# Altium PCB Fibernet.PcbDoc
Units mm, origin at the board's own origin, x right, y up, seen from the top; angles counter-clockwise.
Board outline 76.2 x 32.77 mm, 2 copper layers (Top Layer, Bottom Layer); 94 components, 63 nets, 349 pads, 25 vias.
Unrouted connection lines stored in the file: 227.
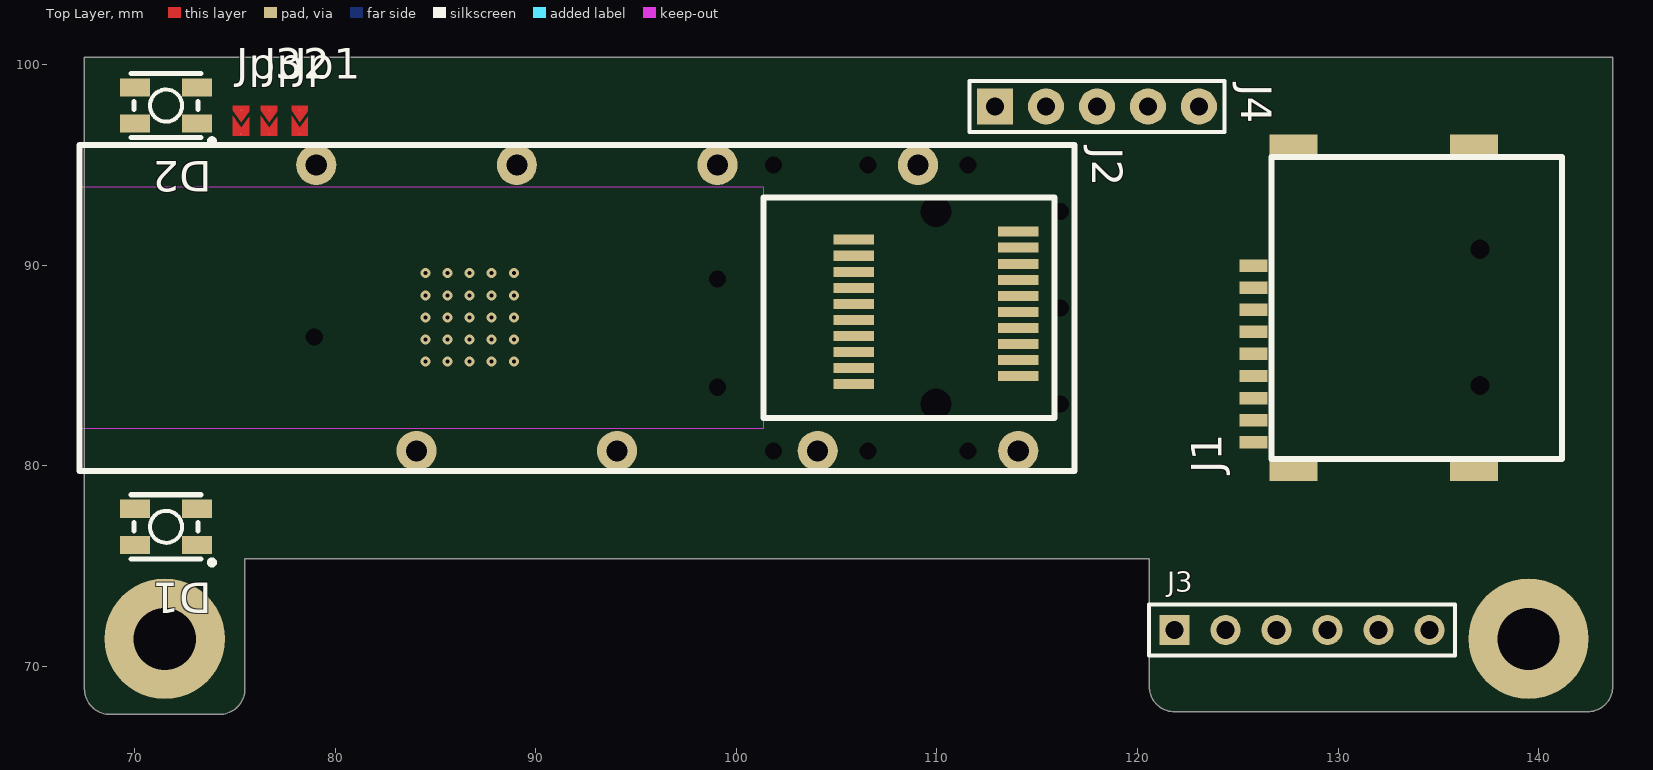
[diagram p0: Top Layer view]
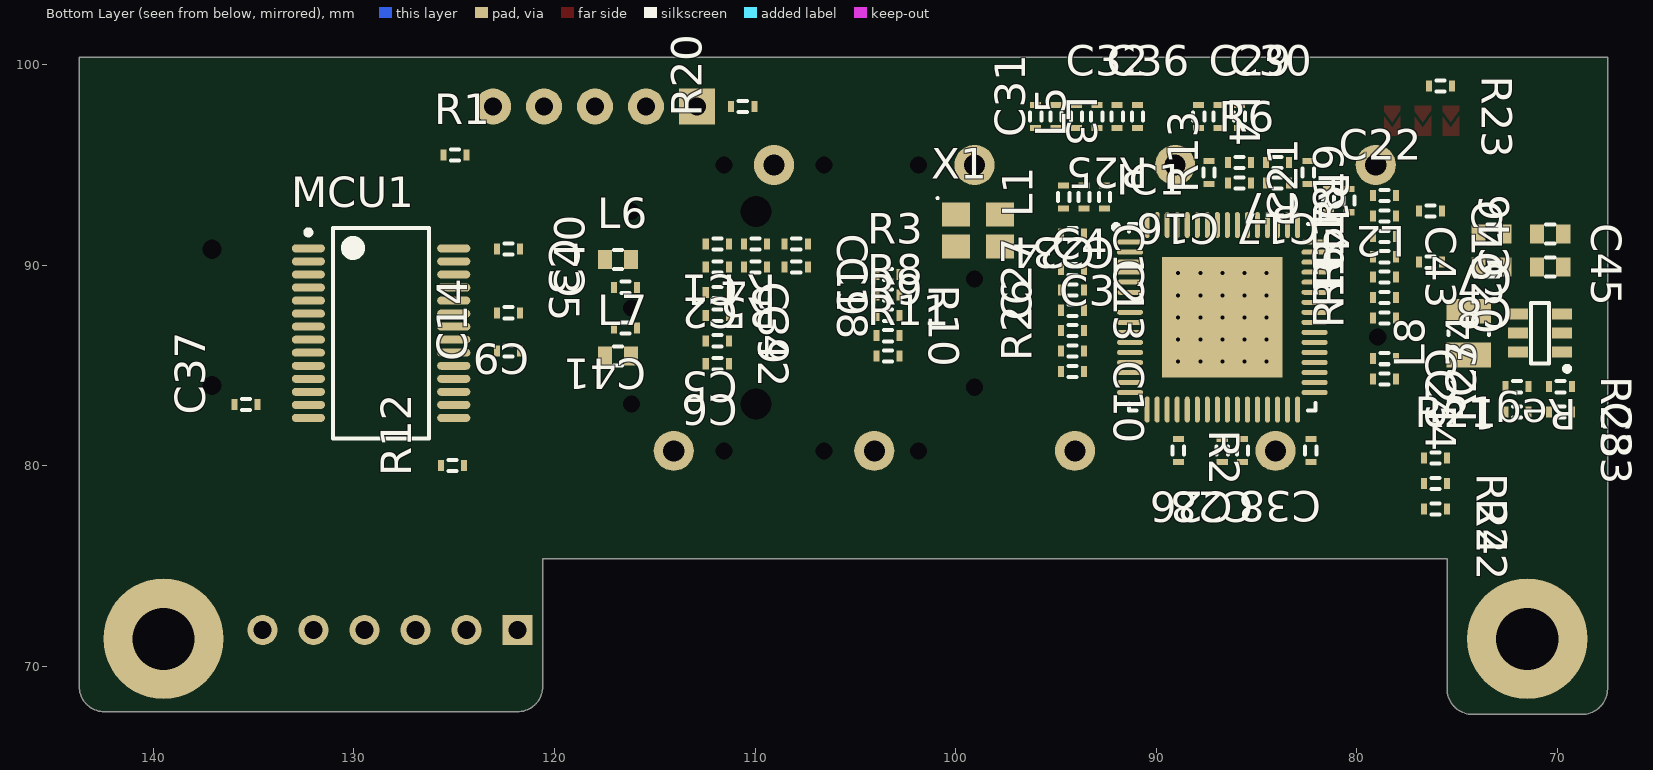
[diagram p1: Bottom Layer view, seen from below]

## Layer stack, top to bottom
Top Solder: solder mask 0.0102, Solder Resist, Dk 3.5
Top Layer: signal copper 0.0356
Dielectric 1: dielectric 0.32, FR-4, Dk 4.8
Bottom Layer: signal copper 0.0356
Bottom Solder: solder mask 0.0102, Solder Resist, Dk 3.5

## Board outline
68.771,67.608 cw(c68.771,68.878) 67.501,68.878 67.501,100.374 143.701,100.374 143.701,69.005 cw(c142.431,69.005) 142.431,67.735 121.857,67.735 cw(c121.857,69.005) 120.587,69.005 120.587,75.374 75.501,75.374 75.501,68.878 cw(c74.231,68.878) 74.231,67.608

## Design rules (kind name [scope] priority, off if disabled: settings)
BoardOutlineClearance [All] p1: gap=0.254 ignorepadtopadclearanceinfootprint=FALSE except(0: Arc-SplitContinuation Track-SplitContinuation SMDPad-SplitContinuation THPad-SplitContinuation Via-SplitContinuation Fill-SplitContinuation Poly-SplitContinuation Region-SplitContinuation Text-SplitContinuation)
Clearance [All] p1: gap=0.254 ignorepadtopadclearanceinfootprint=FALSE except(0: Arc-Text Arc-Hole Track-Text Track-Hole SMDPad-Text SMDPad-Hole THPad-Text THPad-Hole Via-Text Via-Hole Fill-Text Fill-Hole Poly-Text Poly-Hole Region-Text Region-Hole Text-Text Text-Hole; 0.152: Arc-Arc Arc-Track Arc-SMDPad Arc-THPad Arc-Via Track-Track Track-SMDPad Track-THPad Track-Via SMDPad-SMDPad SMDPad-THPad SMDPad-Via THPad-THPad THPad-Via THPad-Fill THPad-Poly THPad-Region Via-Via)
DiffPairsRouting [All] p1: maxlimit=0.254 minlimit=0.152 mostfreqgap=0.203 toplayer_minwidth=0.152 toplayer_maxwidth=10 toplayer_prefwidth=0.22 bottomlayer_minwidth=0.152 bottomlayer_maxwidth=10 bottomlayer_prefwidth=0.22 maxuncoupledlength=12.7
HoleSize [All] p1: absolutevalues=TRUE maxlimit=10 minlimit=0.025 maxpercent=80.000 minpercent=20.000
MinimumSolderMaskSliver [All] p1: minsoldermaskwidth=0
PlaneConnect [All] p1: pad.planeconnectstyle=Relief pad.reliefexpansion=0.508 pad.reliefentries=4 pad.reliefconductorwidth=0.254 pad.reliefairgap=0.254 via.planeconnectstyle=Direct via.reliefexpansion=0.508 via.reliefentries=4 via.reliefconductorwidth=0.254 via.reliefairgap=0.254
PolygonConnect PolygonConnect_1 [InNet('NetC33_1') vs InNet('NetC33_1')] p1: connectstyle=Direct reliefconductorwidth=0.254 reliefentries=4 polygonreliefangle="90 Angle" airgapwidth=0.254
PolygonConnect PolygonConnect_2 [InNet('+VDrive') or InNet('NetC99_2') or InNet('NetC100_2') or InNet('NetC115_2') or InNet('NetC116_2') vs InNet('+VDrive') or InNet('NetC99_2') or InNet('NetC100_2') or InNet('NetC115_2') or InNet('NetC116_2')] p2: connectstyle=Direct reliefconductorwidth=0.254 reliefentries=4 polygonreliefangle="90 Angle" airgapwidth=0.254
PolygonConnect [All] p3: thpad.connectstyle=Relief thpad.reliefconductorwidth=0.254 thpad.reliefentries=4 thpad.polygonreliefangle="90 Angle" thpad.airgapwidth=0.254 smdpad.connectstyle=Relief smdpad.reliefconductorwidth=0.254 smdpad.reliefentries=4 smdpad.polygonreliefangle="90 Angle" smdpad.airgapwidth=0.254 via.connectstyle=Direct via.reliefconductorwidth=0.254 via.reliefentries=4 via.polygonreliefangle="90 Angle" via.airgapwidth=0.254
RoutingVias [All] p1: holewidth=0 width=0 viastyle="Through Hole" minholewidth=0 minwidth=0 maxholewidth=0.711 maxwidth=1.27
SilkToSilkClearance [All] p1: silktosilkclearance=0
SilkToSolderMaskClearance [IsPad] p1: minsilkscreentomaskgap=0 clearancetoexposedcopper=TRUE
SolderMaskExpansion [All] p1: expansion=0.102 istentingtop=FALSE
Width [All] p1: maxlimit=10 minlimit=0.153 preferedwidth=0.3 minimp=50.000000 maximp=50.000000 favimp=50.000000
24 further rules are at their usual default settings.

## Classes and differential pairs
component class "Power Stuff": C15 C16 C17 C18 C19 C20 C21 C22 C23 C24 C25 C26 C27 C28 C29 C30 C31 C32 C33 C34 C35 C36 C37 C38 C39 C40 C41 C42 C43 C44 C45 C46 IC1 L1 L2 L3 L4 L5 L6 L7 L8 R27 R28 Reg1
component class Fibernet: C1 C2 C3 C4 C5 C6 C7 C8 C9 C10 C12 C13 C14 D1 D2 J1 J2 J3 J4 Jp1 Jp2 Jp3 MCU1 R1 R2 R3 R4 R5 R6 R7 R8 R9 R10 R11 R12 R13 R14 R15 R16 R17 R18 R19 R20 R21 R22 R23 R24 R25 R26 X1
differential pair LAN_TX: +LAN_TX_P -LAN_TX_N
differential pair LAN_RX: +LAN_RX_P -LAN_RX_N

## Components (designator, comment, footprint, x,y, rotation, side; value= is the part's Value field where it differs from the comment)
C1 "100nF" 0402 111.887,91.059 r0 bottom
C2 "100nF" 0402 111.887,89.916 r0 bottom
C3 "100nF" 0402 94.174,86.741 r180 bottom
C4 "10uF" 0402 94.174,88.773 r180 bottom
C5 "100nF" 0402 111.887,86.233 r0 bottom
C6 "100nF" 0402 111.887,85.09 r0 bottom
C7 "100nF" 0603 73.279,91.567 r0 bottom
C8 "1uF" 0603 73.279,89.916 r0 bottom
C9 "100nF" 0402 122.301,87.63 r0 bottom
C10 "1uF" 0402 94.174,84.709 r180 bottom
C12 "22pF" 0402 94.174,91.567 r180 bottom
C13 "22pF" 0402 94.174,89.789 r180 bottom
C14 "10uF" 0402 122.301,85.725 r0 bottom
C15 "100nF" 0402 76.327,92.71 r180 bottom
C16 "100nF" 0402 87.376,94.615 r270 bottom
C17 "100nF" 0402 82.423,94.615 r270 bottom
C18 "100nF" 0402 107.95,89.916 r180 bottom
C19 "100nF" 0402 107.95,91.059 r180 bottom
C20 "1uF" 0402 76.327,90.154 r180 bottom
C21 "1uF" 0402 81.407,93.218 r90 bottom
C22 "100nF" 0402 80.391,93.218 r90 bottom
C23 "1uF" 0402 92.583,93.412 r270 bottom
C24 "100nF" 0402 93.599,93.412 r270 bottom
C25 "100nF" 0402 78.613,85.344 r180 bottom
C26 "100nF" 0402 86.71,80.754 r270 bottom
C27 "470pF" 0402 94.174,87.757 r0 bottom
C28 "1uF" 0402 85.694,80.754 r270 bottom
C29 "1uF" 0402 86.868,97.409 r90 bottom
C30 "100nF" 0402 85.852,97.409 r90 bottom
C31 "1uF" 0402 94.996,97.409 r90 bottom
C32 "100nF" 0402 93.98,97.409 r90 bottom
C33 "100pF" 0402 69.85,82.677 r180 bottom
C34 "100nF" 0402 72.009,83.947 r0 bottom
C35 "10uF" 0402 122.301,90.805 r180 bottom
C36 "100nF" 0402 91.948,97.409 r90 bottom
C37 "10uF" 0402 135.382,83.058 r0 bottom
C38 "100nF" 0402 82.296,80.772 r270 bottom
C39 "10uF" 0402 111.887,88.646 r180 bottom
C40 "100nF" 0402 116.459,88.9 r0 bottom
C41 "10uF" 0402 116.459,86.868 r0 bottom
C42 "100nF" 0402 111.887,87.503 r180 bottom
C43 "10uF" 0402 78.613,91.44 r180 bottom
C44 "10uF" 0402 78.613,84.328 r180 bottom
C45 "100nF" 0603 70.358,91.567 r180 bottom
C46 "100nF" 0603 70.358,89.916 r0 bottom
D1 "RGB LED Common anode" 1411 71.568,76.959 r180 top
D2 "RGB LED Common anode" 1411 71.568,97.961 r180 top
IC1 "LAN9250" QFN64 86.705,87.404 r180 bottom
J1 "SD Card" MEM2075 127.779,79.799 r90 top
J2 "SFP" "SFP Con and Cage" 109.058,87.874 r0 top locked
J3 "UART/Power" HDR1X6 121.857,71.818 r0 top
J4 "ICSP" HDR1X5 112.903,97.917 r0 top
Jp1 "AKTY Red" "PCB Jumper NO" 78.232,97.155 r90 top
Jp2 "AKTY Blue" "PCB Jumper NO" 76.708,97.155 r90 top
Jp3 "AKTY Green" "PCB Jumper NO" 75.311,97.155 r90 top
L1 "Ferrite Bead" 0402 94.615,93.412 r90 bottom
L2 "Ferrite Bead" 0402 78.613,93.472 r0 bottom
L3 "Ferrite Bead" 0402 96.012,97.409 r270 bottom
L4 "Ferrite Bead" 0402 87.884,97.409 r270 bottom
L5 "Ferrite Bead" 0402 92.964,97.409 r90 bottom
L6 "1uH" 0603 116.84,90.297 r180 bottom
L7 "1uH" 0603 116.84,85.471 r180 bottom
L8 "6.8uH" 1008 74.422,86.614 r90 bottom
MCU1 "PIC32MX270F256B" TSSOP28_Wide 128.651,86.614 r180 bottom
R1 "10k" 0402 124.968,95.504 r180 bottom
R2 "10k" 0402 88.9,80.772 r270 bottom
R3 "4.7k" 0402 103.378,89.535 r180 bottom
R4 "49.9" 0402 109.982,91.059 r0 bottom
R5 "49.9" 0402 109.982,89.916 r0 bottom
R6 "82" 0402 85.852,95.123 r180 bottom
R7 "82" 0402 83.947,95.123 r0 bottom
R8 "4.7k" 0402 103.378,87.503 r180 bottom
R9 "4.7k" 0402 103.378,86.487 r180 bottom
R10 "4.7k" 0402 103.378,88.519 r180 bottom
R11 "4.7k" 0402 103.378,85.471 r180 bottom
R12 "1k" 0402 125.095,80.01 r0 bottom
R13 "130" 0402 85.852,94.107 r0 bottom
R14 "130" 0402 83.947,94.107 r180 bottom
R15 "10k" 0402 78.613,88.392 r0 bottom
R16 "10k" 0402 78.613,87.376 r0 bottom
R17 "10k" 0402 78.613,89.408 r0 bottom
R18 "10k" 0402 78.613,90.424 r0 bottom
R19 "10k" 0402 78.613,92.456 r0 bottom
R20 "10k" 0402 110.617,97.917 r0 bottom
R21 "1k" 0402 76.073,80.391 r180 bottom
R22 "1k" 0402 76.073,77.851 r180 bottom
R23 "1k" 0402 75.819,98.933 r180 bottom
R24 "1k" 0402 76.073,79.121 r180 bottom
R25 "12.1k 1%" 0402 90.932,97.409 r270 bottom
R26 "1k" 0402 94.174,85.725 r0 bottom
R27 "10k" 0402 72.009,82.677 r0 bottom
R28 "10k" 0402 69.85,83.947 r180 bottom
Reg1 "Buck regulator" TSOT26 70.866,86.614 r0 bottom
X1 "25MHz" "ECS-3225MV Oscillator" 98.89,91.732 r180 bottom

## Footprints (in the part's own frame and the unit in brackets; to place one, negate y for a bottom-side part, rotate by r counter-clockwise, add the part's x,y. Pads: shape width x height; smd on the part's side, far side on the other; paste and mask are expansions set on the pad)
0402 [mm] "Chip Resistor, 2-Leads, Body 1.55x0.85mm, IPC Medium Density"
  rect 0.3x0.55 smd: 1(-0.575,0) 2(0.575,0)
  silkscreen extent -0.2,-0.28 0.2,0.28, body extent -0.53,-0.28 0.53,0.28, height 0.4
0603 [mm] "Chip Resistor, 2-Leads, Body 1.55x0.85mm, IPC Medium Density"
  rect 0.7x0.95 smd: 1(-0.65,0) 2(0.65,0)
  silkscreen extent -0.2,-0.48 0.2,0.48, body extent -0.8,-0.48 0.8,0.48, height 0.55
1008 [mm] "Chip Inductor, 2-Leads, Body 2,50x2,00mm, IPC Medium Density"
  rect 1.23x2.22 smd: 1(-1.085,0) 2(1.085,0)
  silkscreen extent -0.1,-1.01 0.1,1.01, body extent -1.35,-1.1 1.35,1.1, height 1.2
1411 [mm] "4 PIN SMD RGB LED"
  rect 1.5x0.9 smd: 1(1.55,0.9) 2(1.55,-0.9) 3(-1.55,0.9) 4(-1.55,-0.9)
  silkscreen extent -2.41,-1.6 1.75,1.9, body extent -1.75,-1.4 1.75,1.4, height 1.88
"ECS-3225MV Oscillator" [mm] "SON, 4-Leads, Body 2,50x3,20mm, Pitch 1,60mm, Thermal Pad 0,00x0,00mm, IPC Low Density"
  rect 1.4x1.2 smd: 1(-1.1,0.8) 2(-1.1,-0.8) 3(1.1,-0.8) 4(1.1,0.8)
  silkscreen extent -2.06,1.56 -1.96,1.66, body extent -1.65,-1.3 1.65,1.3, height 1.2
HDR1X5 [mm] "Connector; Header; 5 Position"
  rect 1.8x1.8 hole 0.9: 1(0,0)
  round 1.8 hole 0.9: 2(2.54,0) 3(5.08,0) 4(7.62,0) 5(10.16,0)
  silkscreen extent -1.27,-1.27 11.43,1.27
HDR1X6 [mm] "Connector; Header; 6 Position"
  rect 1.5x1.5 hole 0.9: 1(0,0)
  round 1.5 hole 0.9: 2(2.54,0) 3(5.08,0) 4(7.62,0) 5(10.16,0) 6(12.7,0)
  silkscreen extent -1.27,-1.27 13.97,1.27
MEM2075 [mm] "Micro SD Card Holder"
  rect 0.62x1.4 smd: 1(10.18,2) 2(9.08,2) 3(7.98,2) 4(6.88,2) 5(5.78,2) 6(4.68,2) 7(3.58,2) 8(2.48,2) 9(1.38,2)
  rect 1.12x2.4 smd: 6(0,0) 6(0,-9) 6(16.15,-9) 6(16.15,0)
  round 0 hole 0.95: ""(4.2,-9.296) ""(11,-9.296)
  silkscreen extent 0.55,-13.4 15.6,1.1, body extent -0.18,-13.64 16.26,2.21, height 1.4
"PCB Jumper NO" [mil] "Normally open pcb jumper"
  round 1 smd mask+0: 1(23,0) 2(-24,0)
  Top Layer region: -27.75,-16 -27.75,16 12,16 -12,0 10,-16
  Top Layer region: 21,-16 -1,0 23,16 31,16 31,-16
QFN64 [mm] "QFN, 64-Leads, Body 9,00x9,00mm, Pitch 0,50mm, Thermal Pad 6,00x6,00mm, IPC Medium Density"
  oval 1.3x0.25 smd: 1(-4.6,3.75) 2(-4.6,3.25) 3(-4.6,2.75) 4(-4.6,2.25) 5(-4.6,1.75) 6(-4.6,1.25) 7(-4.6,0.75) 8(-4.6,0.25) 9(-4.6,-0.25) 10(-4.6,-0.75) 11(-4.6,-1.25) 12(-4.6,-1.75) 13(-4.6,-2.25) 14(-4.6,-2.75) 15(-4.6,-3.25) 16(-4.6,-3.75) 33(4.6,-3.75) 34(4.6,-3.25) 35(4.6,-2.75) 36(4.6,-2.25) 37(4.6,-1.75) 38(4.6,-1.25) 39(4.6,-0.75) 40(4.6,-0.25) 41(4.6,0.25) 42(4.6,0.75) 43(4.6,1.25) 44(4.6,1.75) 45(4.6,2.25) 46(4.6,2.75) 47(4.6,3.25) 48(4.6,3.75)
  oval 0.25x1.3 smd: 17(-3.75,-4.6) 18(-3.25,-4.6) 19(-2.75,-4.6) 20(-2.25,-4.6) 21(-1.75,-4.6) 22(-1.25,-4.6) 23(-0.75,-4.6) 24(-0.25,-4.6) 25(0.25,-4.6) 26(0.75,-4.6) 27(1.25,-4.6) 28(1.75,-4.6) 29(2.25,-4.6) 30(2.75,-4.6) 31(3.25,-4.6) 32(3.75,-4.6) 49(3.75,4.6) 50(3.25,4.6) 51(2.75,4.6) 52(2.25,4.6) 53(1.75,4.6) 54(1.25,4.6) 55(0.75,4.6) 56(0.25,4.6) 57(-0.25,4.6) 58(-0.75,4.6) 59(-1.25,4.6) 60(-1.75,4.6) 61(-2.25,4.6) 62(-2.75,4.6) 63(-3.25,4.6) 64(-3.75,4.6)
  rect 6x6 smd: 65(0,0)
  silkscreen extent -5.43,-4.65 4.65,4.65, body extent -4.5,-4.5 4.5,4.5, height 1
"SFP Con and Cage" [mm]
  rect 2x0.5 smd: 1(-3.2,3.4) 2(-3.2,2.6) 3(-3.2,1.8) 4(-3.2,1) 5(-3.2,0.2) 6(-3.2,-0.6) 7(-3.2,-1.4) 8(-3.2,-2.2) 9(-3.2,-3) 10(-3.2,-3.8) 11(5,-3.4) 12(5,-2.6) 13(5,-1.8) 14(5,-1) 15(5,-0.2) 16(5,0.6) 17(5,1.4) 18(5,2.2) 19(5,3) 20(5,3.8)
  round 2 hole 1.05: S(-30,7.125) S(-25,-7.125) S(-20,7.125) S(-15,-7.125) S(-10,7.125) S(-5,-7.125) S(0,7.125) S(5,-7.125)
  round 0 hole 0.85: ""(-30.1,-1.455) ""(-10,-3.955) ""(-10,1.445) ""(-7.2,-7.125) ""(-7.2,7.125) ""(-2.5,-7.125) ""(-2.5,7.125) ""(2.5,-7.125) ""(2.5,7.125) ""(7.1,-4.8) ""(7.1,0) ""(7.1,4.8)
  round 0 hole 1.55: ""(0.9,-4.8) ""(0.9,4.8)
  Top Layer keep-out region: -7.712,5.51 -7.712,-5.49 -7.712,-6.035 -41.82,-6.035 -41.82,6.03 -7.712,6.03
  silkscreen extent -41.81,-8.13 7.8,8.13, body extent -41.51,-8 7.47,7.85, height 10.84
TSOT26 [mm] "SOT23, 6-Leads, Body 2.90x2.80mm, Pitch 0.95mm, IPC Medium Density"
  rect 1x0.55 smd: 1(-1.099,0.95) 2(-1.099,0) 3(-1.099,-0.95) 4(1.099,-0.95) 5(1.099,0) 6(1.099,0.95)
  silkscreen extent -1.47,-1.5 0.45,1.9, body extent -1.4,-1.5 1.4,1.5, height 1
TSSOP28_Wide [mm] "TSSOP, 28-Leads, Body 10.20x5.30mm, Pitch 0.65mm, Microchip"
  oval 1.65x0.4 smd paste-0.1: 1(-3.625,4.225) 2(-3.625,3.575) 3(-3.625,2.925) 4(-3.625,2.275) 5(-3.625,1.625) 6(-3.625,0.975) 7(-3.625,0.325) 8(-3.625,-0.325) 9(-3.625,-0.975) 10(-3.625,-1.625) 11(-3.625,-2.275) 12(-3.625,-2.925) 13(-3.625,-3.575) 14(-3.625,-4.225) 15(3.625,-4.225) 16(3.625,-3.575) 17(3.625,-2.925) 18(3.625,-2.275) 19(3.625,-1.625) 20(3.625,-0.975) 21(3.625,-0.325) 22(3.625,0.325) 23(3.625,0.975) 24(3.625,1.625) 25(3.625,2.275) 26(3.625,2.925) 27(3.625,3.575) 28(3.625,4.225)
  silkscreen extent -3.75,-5.25 2.4,5.25, body extent -3.9,-5.25 3.9,5.25, height 2

## Part data
C1 C2 C3 C4 C5 C6 C7 C8 C9 C10 C12 C13 C14 C15 C16 C17 C18 C19 C20 C21 C22 C23 C24 C25 C26 C27 C28 C29 C30 C31 C32 C33 C34 C35 C36 C37 C38 C39 C40 C41 C42 C43 C44 C45 C46: library part Cap, Supplier Part Number 1=1276-2044-1-ND, Supplier Part Number 10=1276-CL10B104KB8NNNLCT-ND, Supplier Part Number 11=399-1085-1-ND, Supplier Part Number 12=1276-1021-1-ND, Supplier Part Number 13=587-2985-1-ND, Supplier Part Number 14=490-14603-1-ND, Supplier Part Number 15=311-3700-1-ND, Supplier Part Number 16=311-1042-1-ND, Supplier Part Number 17=311-1415-1-ND, Supplier Part Number 18=1276-1907-1-ND, Supplier Part Number 19=587-4321-1-ND, Supplier 1=Digi-Key, Supplier 2=Digi-Key, Supplier 3=Digi-Key, Supplier 4=Digi-Key, Supplier 5=Digi-Key, Supplier 6=Digi-Key, Supplier 7=Digi-Key, Supplier 8=Digi-Key, Supplier 9=Digi-Key, Supplier 10=Digi-Key, Supplier 11=Digi-Key, Supplier 12=Digi-Key, Supplier 13=Digi-Key, Supplier 14=Digi-Key, Supplier 15=Digi-Key, Supplier 16=Digi-Key, Supplier 17=Digi-Key, Supplier 18=Digi-Key, Supplier 19=Digi-Key, Supplier Part Number 2=1276-1018-1-ND, Supplier Part Number 3=1276-1182-1-ND, Supplier Part Number 4=1276-1009-1-ND, Supplier Part Number 5=1276-1098-1-ND, Supplier Part Number 6=1276-1119-1-ND, Supplier Part Number 7=490-12737-1-ND, Supplier Part Number 8=1276-1183-1-ND, Supplier Part Number 9=587-1249-1-ND
  C1 C2 C5 C6 C7 C8 C9 C10 C12 C13 C14 C15 C16 C17 C18 C19 C20 C21 C22 C23 C24 C25 C26 C27 C28 C29 C30 C31 C32 C33 C34 C35 C36 C37 C38 C39 C40 C41 C42 C43 C44 C45 C46: Supplier 20=Digi-Key, Supplier 21=Digi-Key, Supplier 22=Digi-Key, Supplier Part Number 20=1276-6767-1-ND, Supplier Part Number 21=1276-7060-1-ND, Supplier Part Number 22=311-1084-1-ND
D1 D2: library part "RGB LED", "RGB LED Invered"
IC1: "10/100 Ethernet controller & PHY", Supplier Part Number 1=LAN9250/ML-ND, ComponentLink1Description=Datasheet, ComponentLink1URL=https://ww1.microchip.com/downloads/en/DeviceDoc/00001913A.pdf, Supplier 1=Digi-Key
J1: Supplier Part Number 1=609-3956-1-ND, Supplier 1=Digi-Key, Supplier 2=Digi-Key, Supplier Part Number 2=2073-MEM2075-00-140-01-ACT-ND
J2: library part "SFP Connector", "SFP Connector with cage", Supplier Part Number 1=UE75-A20-6000TCT-ND, Supplier 1=Digi-Key, Supplier 2=Digi-Key, Supplier Part Number 2=U77-A1118-200TCT-ND
J3: library part "Header 6", "Header, 6-Pin", LatestRevisionDate=17-Jul-2002, LatestRevisionNote="Re-released for DXP Platform.", Publisher="Altium Limited"
J4: library part "Header 5", "Header, 5-Pin", LatestRevisionDate=17-Jul-2002, LatestRevisionNote="Re-released for DXP Platform.", Publisher="Altium Limited"
Jp1 Jp2 Jp3: library part Jumper
L1 L2 L3 L4 L5 L6 L7: library part Inductor, Supplier Part Number 1=541-1250-1-ND, Supplier Part Number 10=SRP1770TA-5R6MCT-ND, Supplier Part Number 11=SRN6028-100MCT-ND, Supplier Part Number 12=SRN2510F-2R2MCT-ND, Supplier Part Number 13=490-3992-1-ND, Supplier 1=Digi-Key, Supplier 2=Digi-Key, Supplier 3=Digi-Key, Supplier 4=Digi-Key, Supplier 5=Digi-Key, Supplier 6=Digi-Key, Supplier 7=Digi-Key, Supplier 8=Digi-Key, Supplier 9=Digi-Key, Supplier 10=Digi-Key, Supplier 11=Digi-Key, Supplier 12=Digi-Key, Supplier 13=Digi-Key, Supplier Part Number 2=541-1253-1-ND, Supplier Part Number 3=SRN6028-3R9MCT-ND, Supplier Part Number 4=SRN6028-4R7MCT-ND, Supplier Part Number 5=490-10563-1-ND, Supplier Part Number 6=1276-6932-1-ND, Supplier Part Number 7=587-2042-1-ND, Supplier Part Number 8=535-12790-1-ND, Supplier Part Number 9=SRP1265A-1R0MCT-ND
L8: library part Inductor, Supplier Part Number 1=541-1250-1-ND, Supplier Part Number 10=SRP1770TA-5R6MCT-ND, Supplier Part Number 11=SRN6028-100MCT-ND, Supplier 1=Digi-Key, Supplier 2=Digi-Key, Supplier 3=Digi-Key, Supplier 4=Digi-Key, Supplier 5=Digi-Key, Supplier 6=Digi-Key, Supplier 7=Digi-Key, Supplier 8=Digi-Key, Supplier 9=Digi-Key, Supplier 10=Digi-Key, Supplier 11=Digi-Key, Supplier Part Number 2=541-1253-1-ND, Supplier Part Number 3=SRN6028-3R9MCT-ND, Supplier Part Number 4=SRN6028-4R7MCT-ND, Supplier Part Number 5=490-10563-1-ND, Supplier Part Number 6=1276-6932-1-ND, Supplier Part Number 7=587-2042-1-ND, Supplier Part Number 8=535-12790-1-ND, Supplier Part Number 9=SRP1265A-1R0MCT-ND
MCU1: library part PIC32MX2xxFxxxB, "32Bit pic with usb", Supplier Part Number 1=PIC32MX270F256B-I/SS-ND, Supplier 1=Digi-Key
R1 R2 R3 R4 R5 R6 R7 R8 R9 R10 R11 R12 R13 R14 R15 R16 R17 R18 R19 R20 R21 R22 R23 R24 R25 R26 R27 R28: library part Resistor
Reg1: library part AP6320, Supplier Part Number 1=AP63203WU-7DICT-ND, Supplier 1=Digi-Key, Supplier 2=Digi-Key, Supplier 3=Digi-Key, Supplier Part Number 2=AP63200WU-7DICT-ND, Supplier Part Number 3=AP63201WU-7DICT-ND
X1: library part "Quarz crystal", Supplier Part Number 1=SER4069TR-ND, Supplier 1=Digi-Key

## Free pads (board coordinates)
  round 6 hole 3.1: ""(71.501,71.374) ""(139.501,71.374)

## Via types
v1: diameter 0.5, hole 0.2, Top Layer to Bottom Layer, 25 vias

## Nets (pads, with @x,y where several pads share a name; then routed paths per layer and width w, separated by ;. In a path a pad name is that pad's centre, name@x,y a point inside that pad or via, vN(x,y) a via of type N, cw(c..) or ccw(c..) an arc to the next point about the centre after c; other vN are vias at no path point)
"+1.2V Core": C25.1 C26.1 C27.1 C28.1 IC1.6 IC1.24 IC1.38 L3.1 L4.1
"+1.2V PHY 1": C29.1 C30.1 IC1.56 L4.2
"+1.2V PHY 2": C31.1 C32.1 IC1.59 L3.2
+3.3V: C3.2 C4.2 C7.2 C8.2 C9.2 C10.2 C15.1 C16.1 C17.1 C18.1 C19.1 C20.1 C33.1 C35.1 C37.1 C38.1 C43.1 C44.1 IC1.5 IC1.7 IC1.8 IC1.14 IC1.20 IC1.32 IC1.37 IC1.47 J1.4 J4.2 L1.1 L2.1 L5.2 L6.1 L7.1 L8.2 MCU1.13 MCU1.23 MCU1.28 R1.1 R2.1 R3.2 R4.1 R5.1 R6.1 R7.1 R8.2 R9.2 R10.2 R11.2 R15.1 R16.1 R20.1 R27.2
"+3.3V PHY 1": C21.1 C22.1 IC1.51 L2.2
"+3.3V PHY 2": C23.1 C24.1 IC1.64 L1.2
"+3.3V SFP RX": C41.1 C42.1 J2.15 L6.2
"+3.3V SFP TX": C39.1 C40.1 J2.16 L7.2
+5V: C45.2 C46.1 D1.1 J3.6 Reg1.2 Reg1.3
GND: C3.1 C4.1 C7.1 C8.1 C9.1 C10.1 C12.1 C13.1 C14.1 C15.2 C16.2 C17.2 C18.2 C19.2 C20.2 C21.2 C22.2 C23.2 C24.2 C25.2 C26.2 C27.2 C28.2 C29.2 C30.2 C31.2 C32.2 C35.2 C36.2 C37.2 C38.2 C39.2 C40.2 C41.2 C42.2 C43.2 C44.2 C45.1 C46.2 IC1.4 IC1.34 IC1.41 IC1.65 J1. J1.6 J2.1 J2.3 J2.9 J2.10 J2.11 J2.14 J2.17 J2.20 J2.S J3.1 J4.3 Jp1.2 Jp2.2 Jp3.2 MCU1.8 MCU1.19 MCU1.27 R13.2 R14.2 R17.1 R18.1 R19.1 R25.1 R26.2 R28.1 Reg1.4
  other v1: 84.505,85.204 85.605,85.204 86.705,85.204 87.805,85.204 88.905,85.204 84.505,86.304 85.605,86.304 86.705,86.304 87.805,86.304 88.905,86.304 84.505,87.404 85.605,87.404 86.705,87.404 87.805,87.404 88.905,87.404 84.505,88.504 85.605,88.504 86.705,88.504 87.805,88.504 88.905,88.504 84.505,89.604 85.605,89.604 86.705,89.604 87.805,89.604 88.905,89.604
"LAN CS": IC1.50 MCU1.18
"LAN LOS": IC1.9 J2.8
"LAN MISO": IC1.13 MCU1.24
"LAN MOSI": IC1.17 MCU1.17
"LAN RST": IC1.11 MCU1.16 R26.1
"LAN SCK": IC1.19 MCU1.26
LAN_RX_N: C6.1 IC1.54 R7.2 R14.1
LAN_RX_P: C5.1 IC1.55 R6.2 R13.1
LAN_TX_N: C1.1 IC1.52 R4.2
LAN_TX_P: C2.1 IC1.53 R5.2
LED2: D2.1 R23.1
"LED B": D1.3 R22.2
"LED G": D1.2 R21.2
"LED R": D1.4 R24.2
MCLR: J4.1 MCU1.1 R20.2
NetC1_2: C1.2 J2.19
NetC2_2: C2.2 J2.18
NetC5_2: C5.2 J2.13
NetC6_2: C6.2 J2.12
NetC12_2: C12.2 IC1.1 X1.4
NetC13_2: C13.2 IC1.2 X1.2
NetC14_2: C14.2 MCU1.20
NetC33_2: C33.2 R27.1 R28.2 Reg1.1
NetC34_1: C34.1 Reg1.6
NetC34_2: C34.2 L8.1 Reg1.5
NetC36_1: C36.1 IC1.58 L5.1
NetD2_1: D2.4 Jp1.1
NetD2_3: D2.3 Jp2.1
NetD2_4: D2.2 Jp3.1
NetIC1_42: IC1.42 R16.2
NetIC1_43: IC1.43 R15.2
NetIC1_45: IC1.45 R17.2 R23.2
NetIC1_46: IC1.46 R18.2
NetIC1_48: IC1.48 R19.2
NetIC1_57: IC1.57 R25.2
NetJ1_11: J1.9 R2.2 R12.2
NetJ2_2: J2.2 R3.1
NetJ2_4: J2.4 R10.1
NetJ2_5: J2.5 R8.1
NetJ2_6: J2.6 R9.1
NetJ2_7: J2.7 R11.1
NetMCU1_6: MCU1.6 R21.1
PGC: J4.5 MCU1.5
PGD: J4.4 MCU1.4
"SD CD / LAN IRQ": IC1.44 MCU1.2 R12.1
"SD CLK": J1.5 MCU1.25
"SD CS": J1.2 MCU1.11
"SD MISO": J1.7 MCU1.3 R1.2
"SD MOSI": J1.3 MCU1.12
"UART RX": J3.2 MCU1.10
"UART RX_EN": J3.3 MCU1.9 R24.1
"UART TX": J3.5 MCU1.14
"UART TX_EN": J3.4 MCU1.7 R22.1
pads on no net: IC1.3 IC1.10 IC1.12 IC1.15 IC1.16 IC1.18 IC1.21 IC1.22 IC1.23 IC1.25 IC1.26 IC1.27 IC1.28 IC1.29 IC1.30 IC1.31 IC1.33 IC1.35 IC1.36 IC1.39 IC1.40 IC1.49 IC1.60 IC1.61 IC1.62 IC1.63 J1.1 J1.8 J2. MCU1.15 MCU1.21 MCU1.22 X1.1 X1.3

## Silkscreen, mask and mechanical layers (free items; w line width, h text height)
Board Shape:
  lines w0.3: 67.501,68.878 ccw(c68.771,68.878) 68.771,67.608 74.231,67.608 ccw(c74.231,68.878) 75.501,68.878 75.501,75.374 120.587,75.374 120.587,69.005 ccw(c121.857,69.005) 121.857,67.735 142.431,67.735 ccw(c142.431,69.005) 143.701,69.005 143.701,75.374 143.701,100.374 67.501,100.374 67.501,75.374 67.501,68.878